# Altium PCB pcb.PcbDoc
Units mm, origin at the board's own origin, x right, y up, seen from the top; angles counter-clockwise.
Board outline 48.77 x 51.31 mm, 2 copper layers (Top Layer, Bottom Layer); 49 components, 38 nets, 197 pads, 79 vias.
Unrouted connection lines stored in the file: 2.
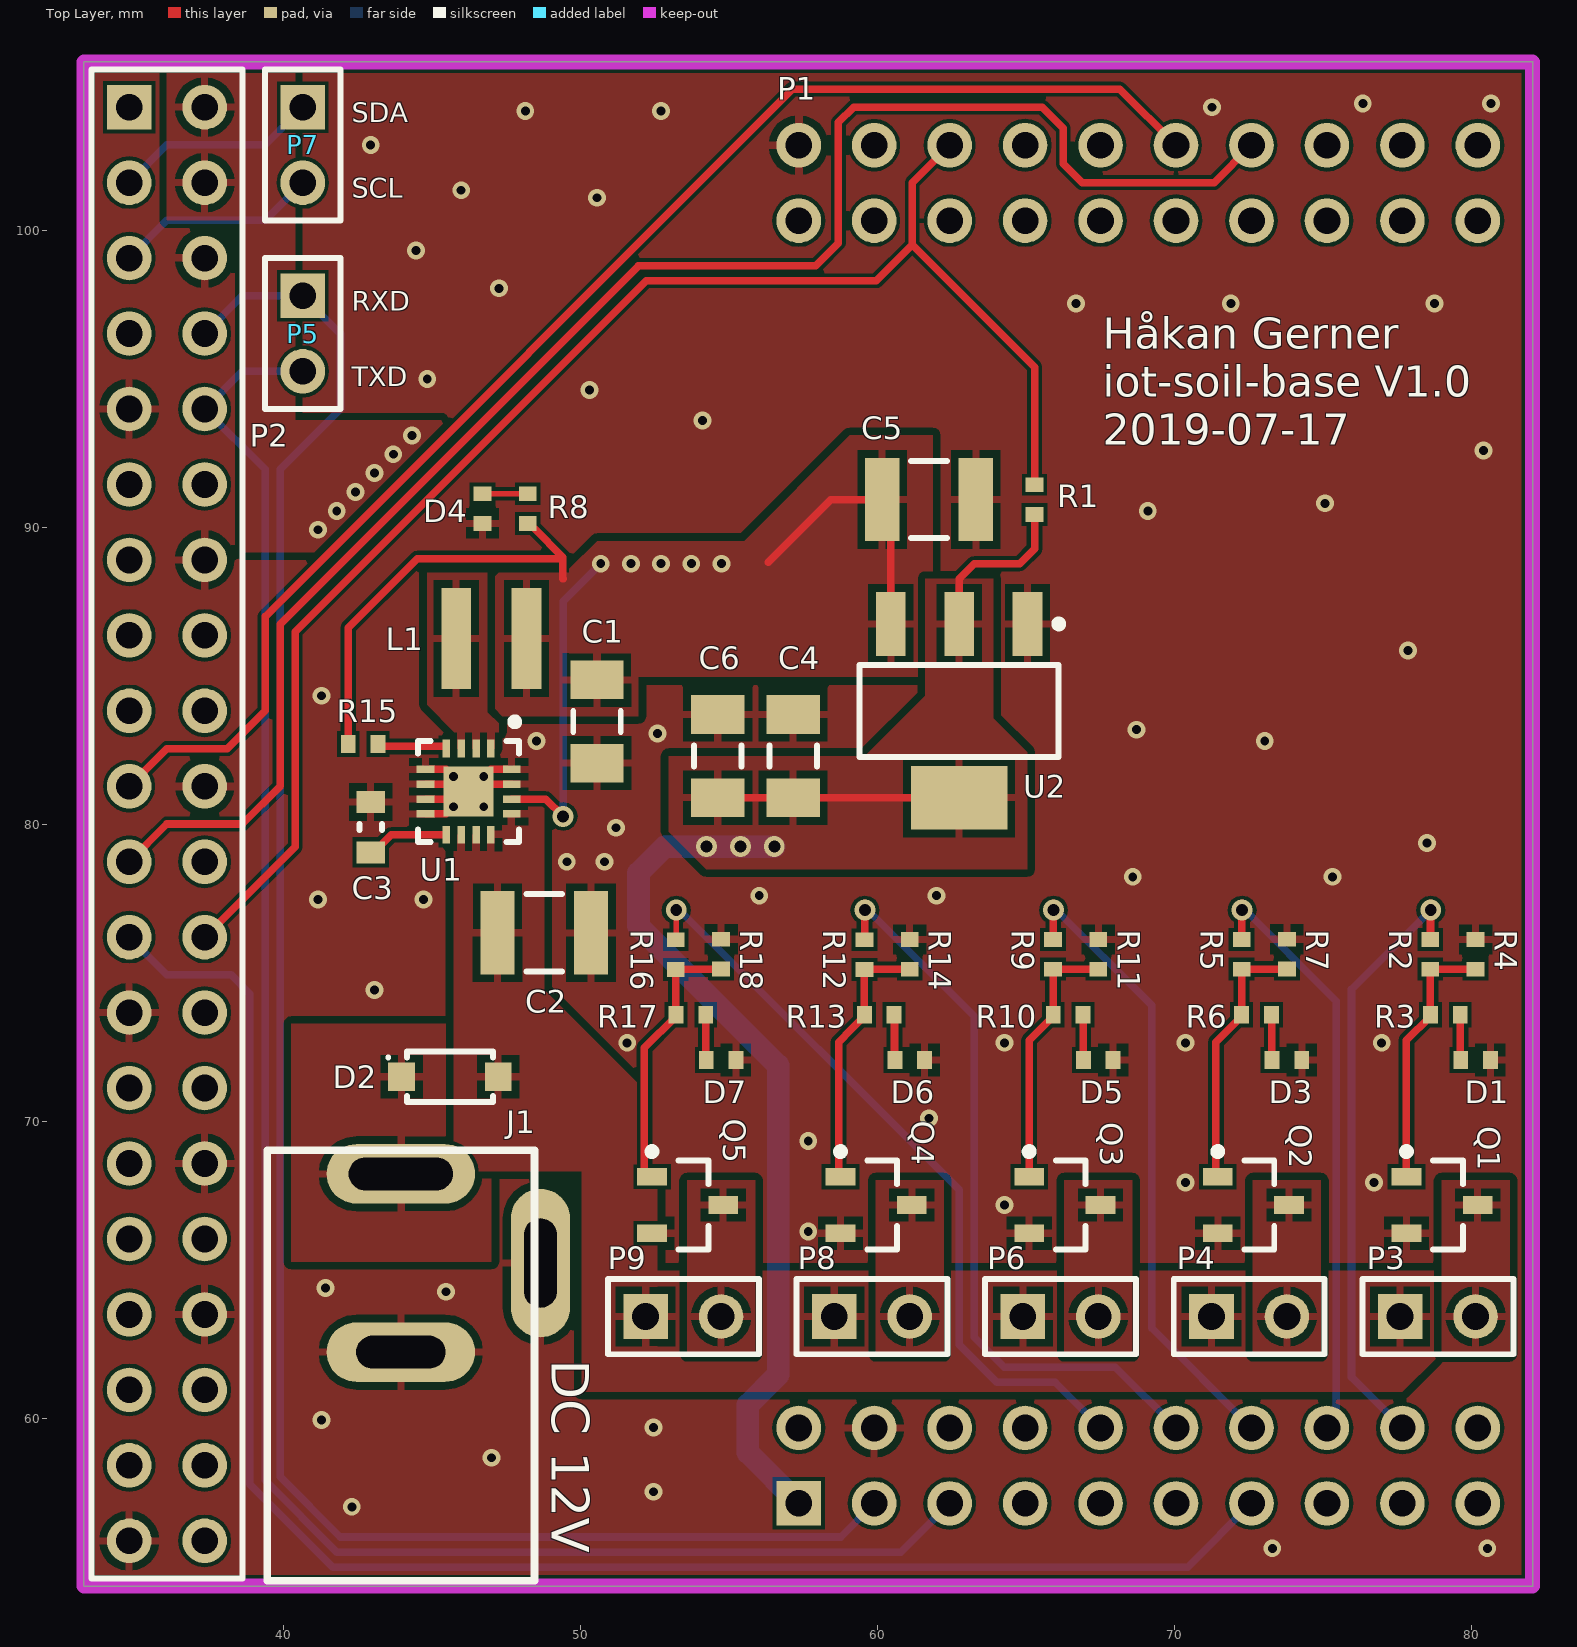
[diagram p0: Top Layer view]
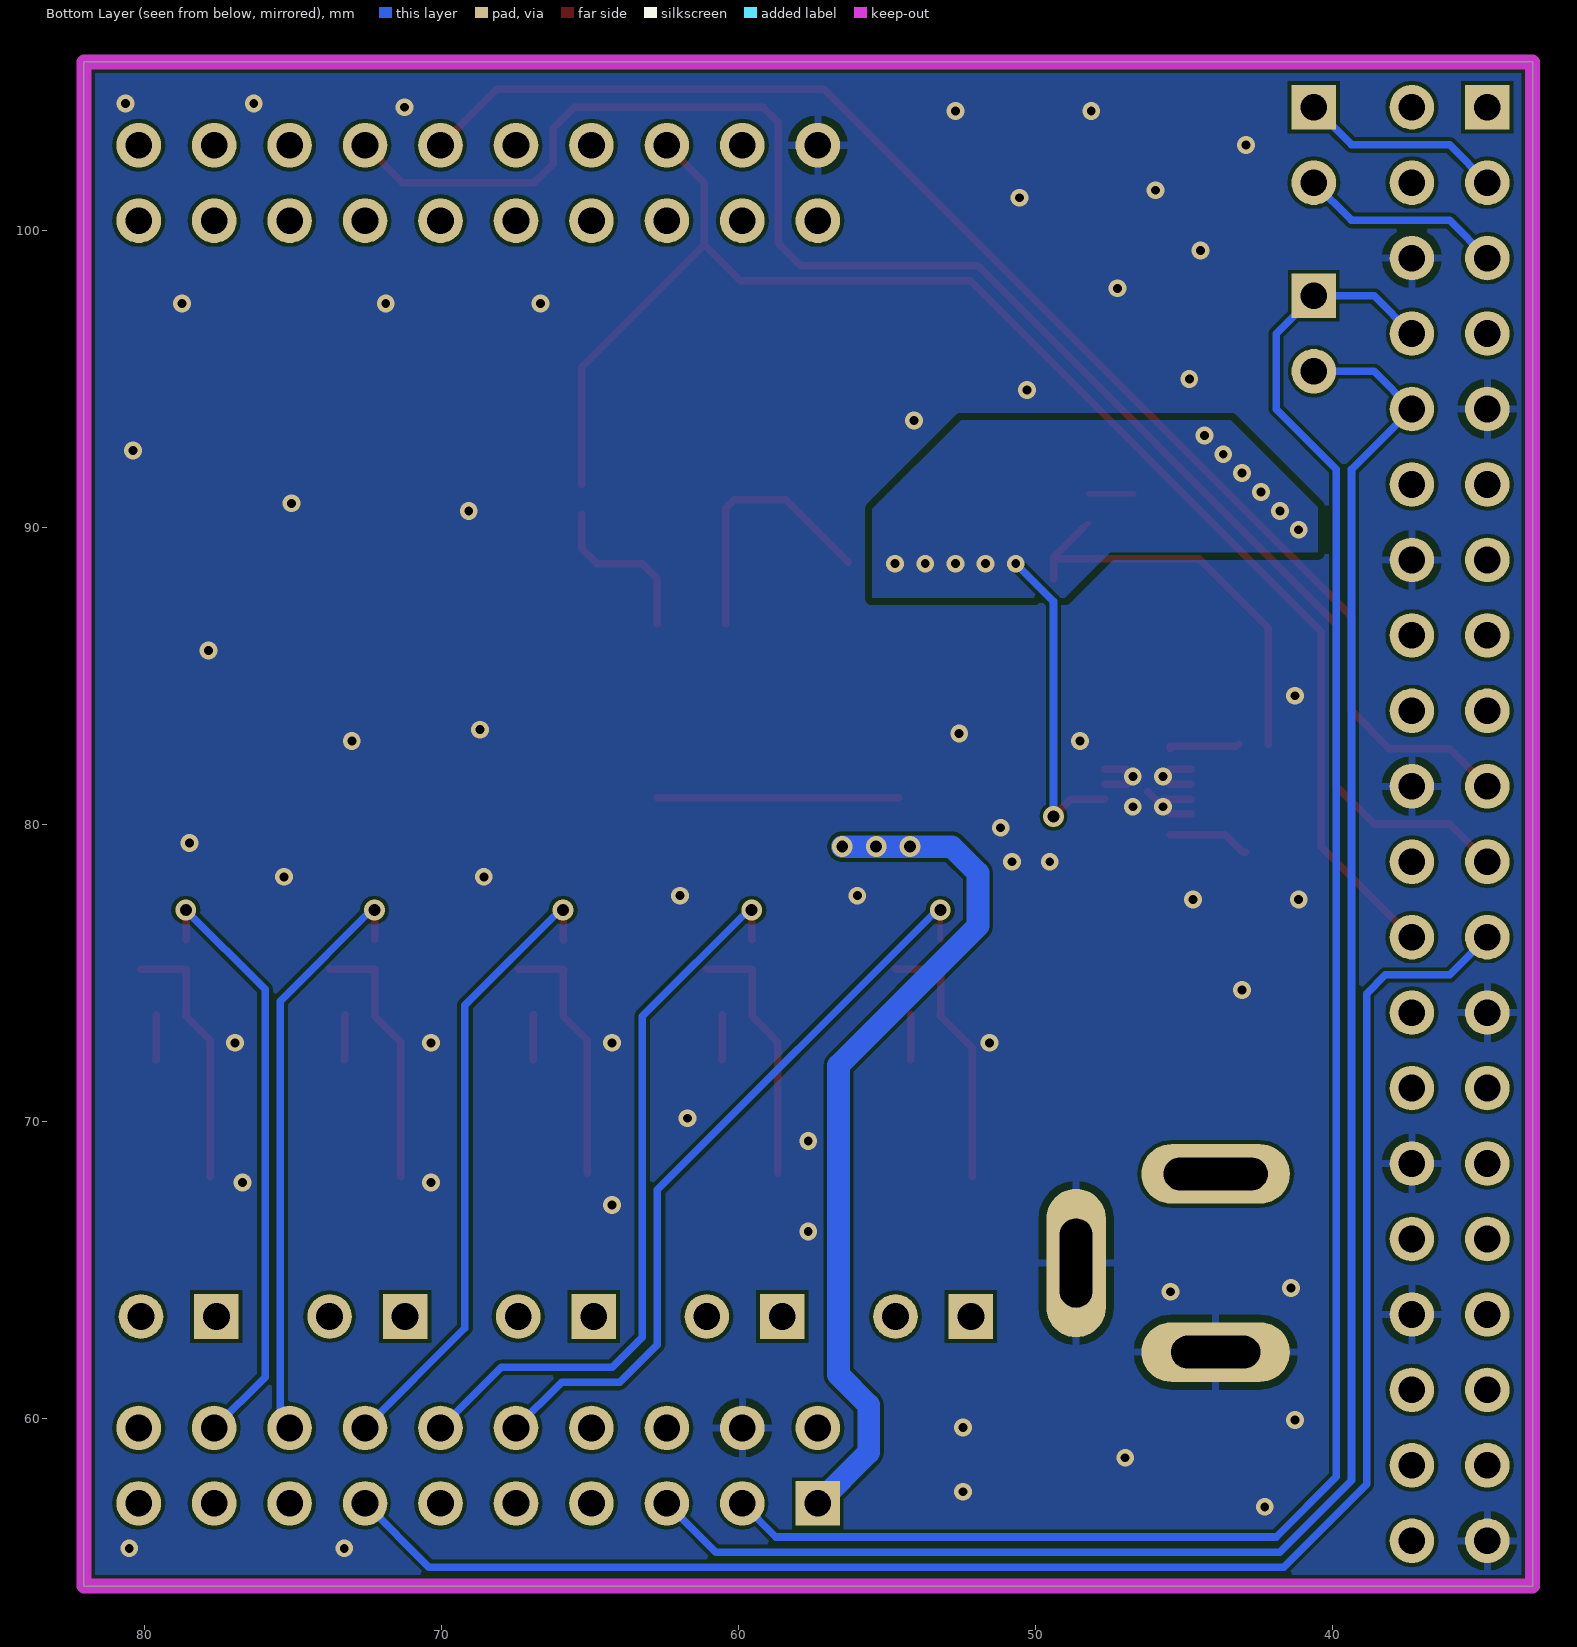
[diagram p1: Bottom Layer view, seen from below]
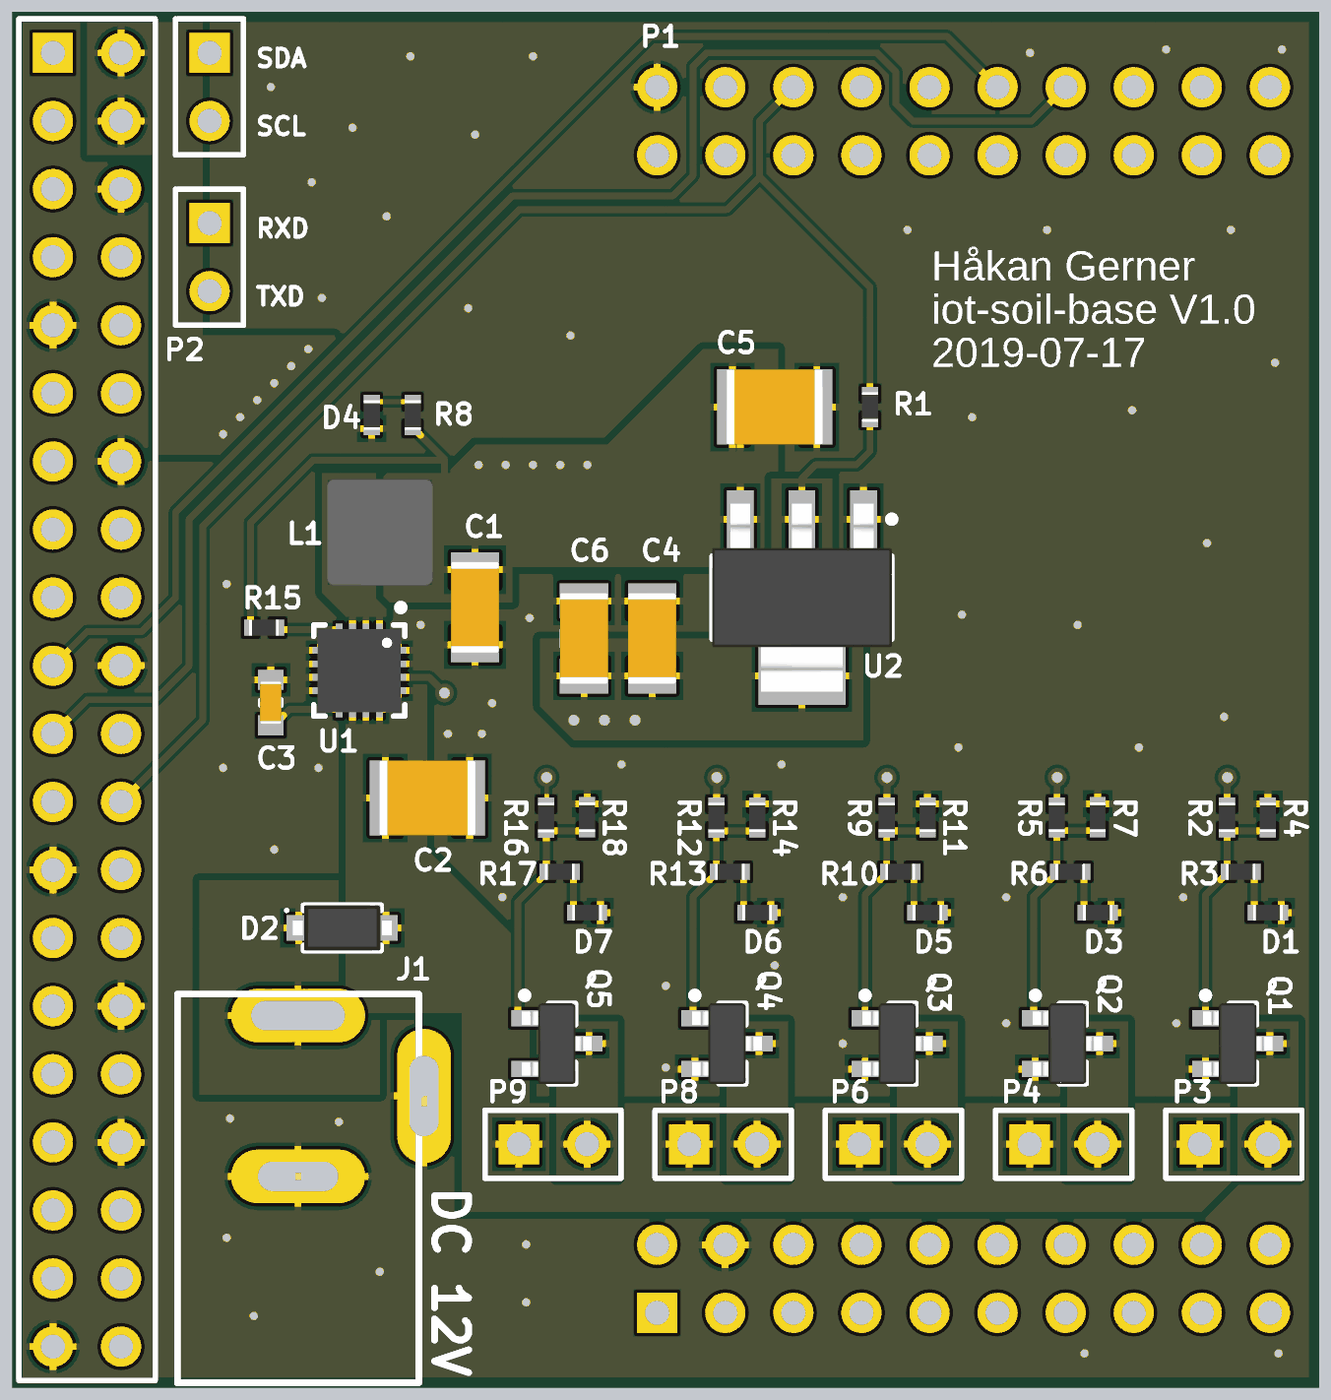
[diagram p2: 3D render of the assembled board from above, using the file's embedded part models]

## Layer stack, top to bottom
Top Solder: solder mask 0.0102, Solder Resist, Dk 3.5
Top Layer: signal copper 0.0356
Dielectric 1: dielectric 0.32, FR-4, Dk 4.8
Bottom Layer: signal copper 0.0356
Bottom Solder: solder mask 0.0102, Solder Resist, Dk 3.5

## Board outline
33.274,54.356 82.042,54.356 82.042,105.664 33.274,105.664

## Design rules (kind name [scope] priority, off if disabled: settings)
Clearance [All] p1: gap=0.127 ignorepadtopadclearanceinfootprint=FALSE except(0.254: Fill-Fill Fill-Poly Fill-Region Fill-Text Fill-Hole Poly-Poly Poly-Region Poly-Text Poly-Hole Region-Region Region-Text Region-Hole)
ComponentClearance ComponentClearance_1 [InComponent('P1')] p1: gap=0 collisioncheckmode=3 verticalgap=0 showdistances=FALSE
ComponentClearance [All] p2: gap=0.254 collisioncheckmode=3 verticalgap=0.254 showdistances=FALSE
PlaneConnect [All] p1: pad.planeconnectstyle=Relief pad.reliefexpansion=0.508 pad.reliefentries=4 pad.reliefconductorwidth=0.254 pad.reliefairgap=0.254 via.planeconnectstyle=Direct via.reliefexpansion=0.508 via.reliefentries=4 via.reliefconductorwidth=0.254 via.reliefairgap=0.254
PolygonConnect [All] p1: thpad.connectstyle=Relief thpad.reliefconductorwidth=0.254 thpad.reliefentries=4 thpad.polygonreliefangle="90 Angle" thpad.airgapwidth=0.254 smdpad.connectstyle=Relief smdpad.reliefconductorwidth=0.254 smdpad.reliefentries=4 smdpad.polygonreliefangle="90 Angle" smdpad.airgapwidth=0.254 via.connectstyle=Direct via.reliefconductorwidth=0.254 via.reliefentries=4 via.polygonreliefangle="90 Angle" via.airgapwidth=0.254
RoutingVias [All] p1: holewidth=0.4 width=0.7 viastyle="Through Hole" minholewidth=0.3 minwidth=0.6 maxholewidth=0.5 maxwidth=0.8
SolderMaskExpansion [All] p1: expansion=0.127
Width Width_1 [InNet('3V3') OR InNet('5V') OR InNet('GND') OR InNet('12V')] p1: maxlimit=0.762 minlimit=0.127 preferedwidth=0.254 minimp=50.000000 maximp=50.000000 favimp=50.000000
Width [All] p2: maxlimit=0.254 minlimit=0.127 preferedwidth=0.178 minimp=50.000000 maximp=50.000000 favimp=50.000000
28 further rules are at their usual default settings.

## Components (designator, comment, footprint, x,y, rotation, side; value= is the part's Value field where it differs from the comment)
C1 "GCJ31CR70J226KE01" "1206 (CAP)" 50.546,83.46 r270 top value=22uF
C2 "GCM32ER71E106KA57" "1210 (CAP)" 48.768,76.348 r0 top value=10uF
C3 "Cap" "0603 (CAP)" 42.926,79.904 r90 top value=3.3nF
C4 "GCJ31CR70J226KE01" "1206 (CAP)" 57.15,82.296 r90 top value=22uF
C5 "GCM32ER71E106KA57" "1210 (CAP)" 61.722,90.932 r0 top value=10uF
C6 "GCJ31CR70J226KE01" "1206 (CAP)" 54.61,82.296 r90 top value=22uF
D1 "SML-P11VTT86R" "0402 (RES)" 80.122,72.066 r0 top
D2 "D Schottky" SOD123 45.593,71.501 r0 top
D3 "SML-P11VTT86R" "0402 (RES)" 73.772,72.066 r0 top
D4 "SML-P11VTT86R" "0402 (RES)" 46.69,90.629 r270 top
D5 "SML-P11VTT86R" "0402 (RES)" 67.422,72.066 r0 top
D6 "SML-P11VTT86R" "0402 (RES)" 61.072,72.066 r0 top
D7 "SML-P11VTT86R" "0402 (RES)" 54.722,72.066 r0 top
J1 "Barrel Jack" PRT-00119 43.942,54.53 r0 top
L1 "XFL4020-222MEC" XFL4020-222MEC 46.99,86.254 r0 top value=2.2uH
P1 "TI LP" PINHEADER 68.768,80 r90 top locked
P2 "Raspberry Pi" HDR2X20 34.798,104.14 r270 top
P3 "Header 2" HDR1X2 77.582,63.43 r0 top
P4 "Header 2" HDR1X2 71.232,63.43 r0 top
P5 "Header 2" HDR1X2 40.64,97.79 r270 top
P6 "Header 2" HDR1X2 64.882,63.43 r0 top
P7 "Header 2" HDR1X2 40.64,104.14 r270 top
P8 "Header 2" HDR1X2 58.532,63.43 r0 top
P9 "Header 2" HDR1X2 52.182,63.43 r0 top
Q1 "ZXMN2F30FHTA" SOT23-NMOS 78.994,67.183 r0 top
Q2 "ZXMN2F30FHTA" SOT23-NMOS 72.644,67.183 r0 top
Q3 "ZXMN2F30FHTA" SOT23-NMOS 66.294,67.183 r0 top
Q4 "ZXMN2F30FHTA" SOT23-NMOS 59.944,67.183 r0 top
Q5 "ZXMN2F30FHTA" SOT23-NMOS 53.594,67.183 r0 top
R1 "DNM" "0402 (RES)" 65.278,90.932 r270 top value=10K
R2 "Res1" "0402 (RES)" 78.598,75.622 r90 top value=300
R3 "Res1" "0402 (RES)" 79.106,73.59 r0 top value=1.5K
R4 "Res1" "0402 (RES)" 80.122,75.622 r90 top value=100K
R5 "Res1" "0402 (RES)" 72.248,75.622 r90 top value=300
R6 "Res1" "0402 (RES)" 72.748,73.59 r0 top value=1.5K
R7 "Res1" "0402 (RES)" 73.772,75.63 r90 top value=100K
R8 "Res1" "0402 (RES)" 48.214,90.629 r90 top value=1.5K
R9 "Res1" "0402 (RES)" 65.898,75.622 r90 top value=300
R10 "Res1" "0402 (RES)" 66.406,73.59 r0 top value=1.5K
R11 "Res1" "0402 (RES)" 67.422,75.622 r90 top value=100K
R12 "Res1" "0402 (RES)" 59.548,75.614 r90 top value=300
R13 "Res1" "0402 (RES)" 60.048,73.59 r0 top value=1.5K
R14 "Res1" "0402 (RES)" 61.072,75.622 r90 top value=100K
R15 "Res1" "0402 (RES)" 42.672,82.698 r180 top value=100K
R16 "Res1" "0402 (RES)" 53.198,75.614 r90 top value=300
R17 "Res1" "0402 (RES)" 53.706,73.59 r0 top value=1.5K
R18 "Res1" "0402 (RES)" 54.722,75.63 r90 top value=100K
U1 "TPS62143" VQFN-16 46.224,81.1 r270 top
U2 "LM1117-3V3" SOT-223 62.738,83.82 r270 top

## Footprints (in the part's own frame and the unit in brackets; to place one, negate y for a bottom-side part, rotate by r counter-clockwise, add the part's x,y. Pads: shape width x height; smd on the part's side, far side on the other; paste and mask are expansions set on the pad)
"0402 (RES)" [mm] "Chip Resistor, 2-Leads, Body 1,00x0,50mm, IPC Medium Density"
  rect 0.5x0.6 smd: 1(-0.5,0) 2(0.5,0)
  body extent -0.55,-0.3 0.55,0.3, height 0.4
"0603 (CAP)" [mm] "Chip Capacitor, 2-Leads, Body 1,60x0,80mm, IPC Medium Density"
  rect 0.75x0.95 smd: 1(-0.85,0) 2(0.85,0)
  silkscreen extent -0.1,-0.38 0.1,0.38, body extent -0.8,-0.4 0.8,0.4, height 0.6
"1206 (CAP)" [mm] "Chip Capacitor, 2-Leads, Body 3,20x1,60mm, IPC Medium Density"
  rect 1.3x1.8 smd: 1(-1.4,0) 2(1.4,0)
  silkscreen extent -0.35,-0.8 0.35,0.8, body extent -1.7,-0.9 1.7,0.9, height 1.35
"1210 (CAP)" [mm] "Chip Capacitor, 2-Leads, Body 3,20x2,50mm, IPC Medium Density"
  rect 1.15x2.8 smd: 1(-1.575,0) 2(1.575,0)
  silkscreen extent -0.6,-1.3 0.6,1.3, body extent -1.8,-1.4 1.8,1.4, height 2.8
HDR1X2 [mm] "Connector; Header; 2 Position"
  rect 1.5x1.5 hole 0.9: 1(0,0)
  round 1.5 hole 0.9: 2(2.54,0)
  silkscreen extent -1.27,-1.27 3.81,1.27
HDR2X20 [mm] "Connector; Header; 20x2 Position"
  rect 1.5x1.5 hole 0.9: 1(0,0)
  round 1.5 hole 0.9: 2(0,2.54) 3(2.54,0) 4(2.54,2.54) 5(5.08,0) 6(5.08,2.54) 7(7.62,0) 8(7.62,2.54) 9(10.16,0) 10(10.16,2.54) 11(12.7,0) 12(12.7,2.54) 13(15.24,0) 14(15.24,2.54) 15(17.78,0) 16(17.78,2.54) 17(20.32,0) 18(20.32,2.54) 19(22.86,0) 20(22.86,2.54) 21(25.4,0) 22(25.4,2.54) 23(27.94,0) 24(27.94,2.54) 25(30.48,0) 26(30.48,2.54) 27(33.02,0) 28(33.02,2.54) 29(35.56,0) 30(35.56,2.54) 31(38.1,0) 32(38.1,2.54) 33(40.64,0) 34(40.64,2.54) 35(43.18,0) 36(43.18,2.54) 37(45.72,0) 38(45.72,2.54) 39(48.26,0) 40(48.26,2.54)
  silkscreen extent -1.27,-1.27 49.53,3.81
PINHEADER [mm]
  rect 1.5x1.5 hole 0.9: 1(-22.86,11.43)
  round 1.5 hole 0.9: 2(-22.86,8.89) 3(-22.86,6.35) 4(-22.86,3.81) 5(-22.86,1.27) 6(-22.86,-1.27) 7(-22.86,-3.81) 8(-22.86,-6.35) 9(-22.86,-8.89) 10(-22.86,-11.43) 11(22.86,-11.43) 12(22.86,-8.89) 13(22.86,-6.35) 14(22.86,-3.81) 15(22.86,-1.27) 16(22.86,1.27) 17(22.86,3.81) 18(22.86,6.35) 19(22.86,8.89) 20(22.86,11.43) 21(-20.32,11.43) 22(-20.32,8.89) 23(-20.32,6.35) 24(-20.32,3.81) 25(-20.32,1.27) 26(-20.32,-1.27) 27(-20.32,-3.81) 28(-20.32,-6.35) 29(-20.32,-8.89) 30(-20.32,-11.43) 31(20.32,-11.43) 32(20.32,-8.89) 33(20.32,-6.35) 34(20.32,-3.81) 35(20.32,-1.27) 36(20.32,1.27) 37(20.32,3.81) 38(20.32,6.35) 39(20.32,8.89) 40(20.32,11.43)
PRT-00119 [mm]
  oval 5x2 hole 1.1 slot 3.5 at 0 deg: 1(0,13.7)
  oval 5x2 hole 1.1 slot 3 at 0 deg: 2(0,7.7)
  oval 2x5 hole 1.1 slot 3 at 90 deg: 3(4.7,10.7)
  silkscreen extent -4.5,0 4.5,14.5
SOD123 [mm] "SODFL, 2-Leads, Body 1,55x3,70mm, IPC Medium Density"
  rect 0.9x0.95 smd: 1(-1.625,0) 2(1.625,0)
  silkscreen extent -2.12,-0.85 1.45,0.85, body extent -1.85,-0.85 1.85,0.85, height 1.45
SOT23-NMOS [mm] "SOT23, 3-Leads, Body 2,90x2,45mm, Pitch 0,95mm, IPC Medium Density"
  rect 1x0.6 smd: 1(-1.2,0.95) 2(-1.2,-0.95) 3(1.2,0)
  silkscreen extent -1.32,-1.5 0.7,1.92, body extent -1.3,-1.5 1.3,1.5, height 1.1
SOT-223 [mm] "SOT223, 4-Leads, Body 6,50x7,00mm (avg), Pitch 2,30mm, IPC Medium Density"
  rect 2.15x1 smd: 1(-2.925,2.3) 2(-2.925,0) 3(-2.925,-2.3)
  rect 2.15x3.25 smd: 4(2.925,0)
  silkscreen extent -3.05,-3.35 1.55,3.48, body extent -3.5,-3.35 3.5,3.35, height 1.7
VQFN-16 [mm] "QFN, 16-Leads, Body 3,00x3,00mm, Pitch 0,50mm, Thermal Pad 1,68x1,68mm, IPC Medium Density"
  rect 0.6x0.25 smd: 1(-1.45,0.75) 2(-1.45,0.25) 3(-1.45,-0.25) 4(-1.45,-0.75) 9(1.45,-0.75) 10(1.45,-0.25) 11(1.45,0.25) 12(1.45,0.75)
  rect 0.25x0.6 smd: 5(-0.75,-1.45) 6(-0.25,-1.45) 7(0.25,-1.45) 8(0.75,-1.45) 13(0.75,1.45) 14(0.25,1.45) 15(-0.25,1.45) 16(-0.75,1.45)
  rect 1.68x1.68 smd: 17(0,0)
  silkscreen extent -2.47,-1.7 1.7,1.7, body extent -1.55,-1.55 1.55,1.55, height 1
XFL4020-222MEC [mm]
  rect 1x3.4 smd: 1(-1.185,0) 2(1.185,0)
  body extent -1.99,-2 2.01,2, height 2.1

## Part data
C1 C4 C6: library part Cap, "1206", LatestRevisionDate=17-Jul-2002, LatestRevisionNote="Re-released for DXP Platform.", PackageDescription="Radial Cap, Thru-Hole; 2 Leads; 0.3 in Pin Spacing", PackageReference=RAD-0.3, Published=8-Jun-2000, Publisher="Altium Limited"
C2 C5: library part Cap, "1210", LatestRevisionDate=17-Jul-2002, LatestRevisionNote="Re-released for DXP Platform.", PackageDescription="Radial Cap, Thru-Hole; 2 Leads; 0.3 in Pin Spacing", PackageReference=RAD-0.3, Published=8-Jun-2000, Publisher="Altium Limited"
C3: "0603", LatestRevisionDate=17-Jul-2002, LatestRevisionNote="Re-released for DXP Platform.", PackageDescription="Radial Cap, Thru-Hole; 2 Leads; 0.3 in Pin Spacing", PackageReference=RAD-0.3, Published=8-Jun-2000, Publisher="Altium Limited"
D1 D3 D4 D5 D6 D7: library part LED2, "Typical RED, GREEN, YELLOW, AMBER GaAs LED", LatestRevisionDate=17-Jul-2002, LatestRevisionNote="Re-released for DXP Platform.", PackageDescription="SM LED; 2 Flat Leads", PackageReference=3.2X1.6X1.1, PackageVersion=Feb-2002, Published=8-Jun-2000, Publisher="Altium Limited"
D2: "Schottky Diode", Code_JEDEC=DO-214-AA, LatestRevisionDate=17-Jul-2002, LatestRevisionNote="Re-released for DXP Platform.", PackageDescription="DO-214-AA/SMB; 2 C-Bend Leads; Body 5.3 x 3.6 mm, inc. leads (LxW)", PackageReference=SMB, Published=8-Jun-2000, Publisher="Altium Limited"
J1: library part "DC Barrel"
L1: library part Inductor, "Inductor", Code_IEC=1005, Code_JEITA=0402, LatestRevisionDate=29-May-2009, LatestRevisionNote="IPC-7351 Footprint Added.", PackageDescription="Chip Inductor", PackageReference=0402-A, Published=8-Jun-2000, Publisher="Altium Limited"
P1 P2: library part "Header 20X2", "Header, 20-Pin, Dual row", LatestRevisionDate=17-Jul-2002, LatestRevisionNote="Re-released for DXP Platform.", Publisher="Altium Limited"
P3 P4 P5 P6 P7 P8 P9: "Header, 2-Pin", LatestRevisionDate=17-Jul-2002, LatestRevisionNote="Re-released for DXP Platform.", Publisher="Altium Limited"
Q1 Q2 Q3 Q4 Q5: library part NMOS-2, "N-Channel Power MOSFET", ComponentLink1Description="Manufacturer Link", ComponentLink1URL=http://www.irf.com/, DatasheetVersion=PD-9.814, LatestRevisionDate=17-Jul-2002, LatestRevisionNote="Re-released for DXP Platform.", Note="Pin 2 is electrically connected to pin 4.", PackageDescription="TO, Thru-Hole, Vertical, Heatsink Mounted; 3 In-Line Leads; Pitch 2.54 mm", PackageReference=TO-220AB, PackageVersion=Feb-1997, Published=8-Jun-2000, Publisher="Altium Limited"
R1: library part Res1, "Resistor", LatestRevisionDate=17-Jul-2002, LatestRevisionNote="Re-released for DXP Platform.", PackageDescription="Axial Device, Thru-Hole; 2 Leads; 0.3 in Pin Spacing", PackageReference=AXIAL-0.3, Published=8-Jun-2000, Publisher="Altium Limited"
R2 R3 R4 R5 R6 R7 R8 R9 R10 R11 R12 R13 R14 R15 R16 R17 R18: "Resistor", LatestRevisionDate=17-Jul-2002, LatestRevisionNote="Re-released for DXP Platform.", PackageDescription="Axial Device, Thru-Hole; 2 Leads; 0.3 in Pin Spacing", PackageReference=AXIAL-0.3, Published=8-Jun-2000, Publisher="Altium Limited"
U1: "5V, 2A Switched Buck Regulator"
U2: library part LM1117-FIXED, "Linear Voltage Regulator 800 mA 1.2V Dropout"

## Via types
v1: diameter 0.6, hole 0.3, Top Layer to Bottom Layer, tented both sides, 70 vias
v2: diameter 0.7, hole 0.4, Top Layer to Bottom Layer, tented both sides, 9 vias

## Nets (pads, with @x,y where several pads share a name; then routed paths per layer and width w, separated by ;. In a path a pad name is that pad's centre, name@x,y a point inside that pad or via, vN(x,y) a via of type N, cw(c..) or ccw(c..) an arc to the next point about the centre after c; other vN are vias at no path point)
3V3: C4.1 C6.1 P1.1 R1.2 U2.2 U2.4 | length 43
  Top Layer w0.178: C6.1@54.607,80.899 C6.1
  Top Layer w0.254: C6.1 C4.1 ; C4.1@57.15,80.895 U2.4 ; U2.2 62.738,88.265 63.246,88.773 64.77,88.773 65.278,89.281 R1.2
  Bottom Layer w0.762: v2(56.515,79.248) v2(55.372,79.248) v2(54.229,79.248) 52.832,79.248 51.943,78.359 51.943,76.581 56.642,71.882 56.642,61.468 55.626,60.452 55.626,58.852 P1.1
5V: C1.1 C5.1 L1.2 P2.2 P2.4 R8.1 R15.2 U1.14 U2.3 | length 35.9
  Top Layer w0.178: R8.1 48.264,90.129 48.426,89.968 48.426,89.918 49.399,88.944
  Top Layer w0.254: R15.2 42.172,86.622 44.494,88.944 49.399,88.944 ; U1.14 48.817,80.85 v2(49.403,80.264) ; R8.1@48.426,89.968 49.399,88.994 49.399,88.944 ; 49.403,88.265 49.399,88.269 49.399,88.944 ; 56.314,88.826 58.42,90.932 C5.1 60.438,90.641 U2.3
  Bottom Layer w0.254: v2(49.403,80.264) 49.403,87.503 v1(50.673,88.773)
  other v1: 51.689,88.773 52.705,88.773 53.721,88.773 54.737,88.773 41.148,89.916 41.783,90.551 42.418,91.186 43.053,91.821 43.688,92.456 44.323,93.091
12V: C2.1 D2.2 P3.1 P4.1 P6.1 P8.1 P9.1 U1.10 U1.11 U1.12 U1.13
GND: C1.2 C2.2 C3.2 C4.2 C5.2 C6.2 D1.2 D3.2 D4.2 D5.2 D6.2 D7.2 J1.2 J1.3 P1.20 P1.22 P2.6 P2.9 P2.14 P2.20 P2.25 P2.30 P2.34 P2.39 Q1.2 Q2.2 Q3.2 Q4.2 Q5.2 R4.2 R7.2 R11.2 R14.2 R18.2 U1.5 U1.6 U1.7 U1.8 U1.15 U1.16 U1.17 U2.1 | length 6.9
  Top Layer w0.254: U1.8 45.474,80.35 v1(45.716,80.592) U1.17 ; U1.7 U1.17@45.716,80.85 ; U1.6 45.511,81.35 45.716,81.555 v1(45.716,81.608) 45.474,81.85 U1.5 ; U1.15 46.937,81.35 46.732,81.555 v1(46.732,81.608) 46.974,81.85 U1.16
  other v1: 73.279,55.626 80.518,55.626 42.291,57.023 52.451,57.531 46.99,58.674 52.451,59.69 41.275,59.944 45.466,64.262 41.402,64.389 57.658,66.294 64.262,67.183 70.358,67.945 76.708,67.945 57.658,69.342 61.722,70.104 51.562,72.644 64.262,72.644 70.358,72.644 76.962,72.644 43.053,74.422 41.148,77.47 44.704,77.47 56.007,77.597 61.976,77.597 68.58,78.232 75.311,78.232 49.53,78.74 50.8,78.74 78.486,79.375 51.181,79.883 46.732,80.592 48.514,82.804 73.025,82.804 52.578,83.058 68.707,83.185 41.275,84.328 77.851,85.852 69.088,90.551 75.057,90.805 80.391,92.583 54.102,93.599 50.292,94.615 44.831,94.996 66.675,97.536 71.882,97.536 78.74,97.536 47.244,98.044 44.45,99.314 50.546,101.092 45.974,101.346 42.926,102.87 48.133,104.013 52.705,104.013 71.247,104.14 76.327,104.267 80.645,104.267
LP_RXD: P1.2 P2.8 P5.1 | length 66.3
  Bottom Layer w0.254: P2.8 38.608,97.79 P5.1 41.91,96.52 41.91,93.98 39.878,91.948 39.878,58.039 41.91,56.007 58.745,56.007 P1.2
LP_TXD: P1.3 P2.10 P5.2 | length 65.5
  Bottom Layer w0.254: P5.2 38.608,95.25 P2.10 39.37,91.948 39.37,57.912 41.783,55.499 60.777,55.499 P1.3
NetC3_1: C3.1 U1.9 | length 2.8
  Top Layer w0.254: C3.1 43.026,79.054 43.622,79.65 U1.9
NetD1_1: D1.1 R3.2 | length 1.5
  Top Layer w0.254: R3.2 79.614,73.582 79.614,72.074 D1.1
NetD2_1: D2.1 J1.1
NetD3_1: D3.1 R6.2 | length 1.5
  Top Layer w0.254: R6.2 73.26,73.578 73.26,72.078 D3.1
NetD4_1: D4.1 R8.2 | length 1.5
  Top Layer w0.178: D4.1 R8.2
NetD5_1: D5.1 R10.2 | length 1.5
  Top Layer w0.254: R10.2 66.914,73.582 66.914,72.074 D5.1
NetD6_1: D6.1 R13.2 | length 1.5
  Top Layer w0.254: R13.2 60.56,73.578 60.56,72.078 D6.1
NetD7_1: D7.1 R17.2 | length 1.5
  Top Layer w0.254: R17.2 54.214,73.582 54.214,72.074 D7.1
NetL1_1: L1.1 U1.1 U1.2 U1.3
NetP3_2: P3.2 Q1.3
NetP4_2: P4.2 Q2.3
NetP6_2: P6.2 Q3.3
NetP8_2: P8.2 Q4.3
NetP9_2: P9.2 Q5.3
NetQ1_1: Q1.1 R2.1 R3.1 R4.1 | length 8.9
  Top Layer w0.254: Q1.1 77.794,72.728 78.606,73.54 R3.1 78.602,73.594 78.602,75.118 R2.1 R4.1
NetQ2_1: Q2.1 R5.1 R6.1 R7.1 | length 8.9
  Top Layer w0.254: Q2.1@71.378,68.133 71.378,72.67 72.248,73.54 R6.1 R5.1 72.252,75.126 73.768,75.126 R7.1
NetQ3_1: Q3.1 R9.1 R10.1 R11.1 | length 8.7
  Top Layer w0.254: Q3.1@65.094,68.26 65.094,72.728 65.456,73.09 65.906,73.54 R10.1 65.902,73.594 65.902,75.118 R9.1 R11.1
NetQ4_1: Q4.1 R12.1 R13.1 R14.1 | length 8.7
  Top Layer w0.254: Q4.1@58.678,68.26 58.678,72.67 59.106,73.098 59.548,73.54 R13.1 R12.1 61.064,75.114 R14.1
NetQ5_1: Q5.1 R16.1 R17.1 R18.1 | length 9
  Top Layer w0.254: Q5.1@52.14,68.133 52.14,72.474 53.206,73.54 R17.1 53.202,73.594 53.202,75.118 53.206,75.122 54.714,75.122 R18.1
NetR15_1: R15.1 U1.4 | length 2.4
  Top Layer w0.254: R15.1 43.246,82.624 45.472,82.624 45.474,82.622 U1.4
RESET: P1.35
SCL: P2.5 P7.2 | length 6.9
  Bottom Layer w0.254: P2.5 36.068,100.33 39.37,100.33 P7.2
SDA: P2.3 P7.1 | length 6.9
  Bottom Layer w0.254: P2.3 36.068,102.87 39.37,102.87 P7.1
SPI_CLK: P1.7 P2.23 | length 57.1
  Bottom Layer w0.254: P2.23 36.068,74.93 38.227,74.93 38.862,74.295 38.862,57.785 41.656,54.991 70.429,54.991 P1.7
SPI_CS_N: P1.18 P2.24 R1.1 | length 51.4
  Top Layer w0.254: P2.24 40.386,79.248 40.386,86.487 52.197,98.298 59.944,98.298 61.158,99.512 ; P1.18 61.158,101.6 61.158,99.512 ; R1.1 65.278,95.392 61.158,99.512
SPI_MISO: P1.14 P2.21 | length 56.2
  Top Layer w0.254: P2.21 36.068,80.01 38.608,80.01 39.878,81.28 39.878,86.741 51.943,98.806 57.912,98.806 58.674,99.568 58.674,103.632 59.182,104.14 65.532,104.14 66.243,103.429 66.243,102.235 66.878,101.6 71.318,101.6 P1.14
SPI_MOSI: P1.15 P2.19 | length 47.6
  Top Layer w0.254: P2.19 36.068,82.55 38.1,82.55 39.37,83.82 39.37,86.995 57.125,104.75 68.148,104.75 P1.15
Valve1: P1.25 R16.2 | length 25.7
  Top Layer w0.178: R16.2 53.213,76.129 v2(53.213,77.113) v2@53.213,77.216
  Bottom Layer w0.254: v2@53.213,77.216 62.738,67.691 62.738,62.484 64.008,61.214 65.964,61.214 P1.25
Valve2: P1.26 R12.2 | length 25.2
  Top Layer w0.254: R12.2 59.555,76.121 v2@59.555,77.208 ; v2@59.555,77.328 v2@59.563,77.335
  Bottom Layer w0.254: v2@59.563,77.216 63.246,73.533 63.246,62.738 64.262,61.722 67.996,61.722 P1.26
  other v2: 59.563,77.113
Valve3: P1.27 R9.2 | length 21.4
  Top Layer w0.254: R9.2 65.905,76.129 v2@65.905,77.208 ; v2@65.905,77.328 v2@65.913,77.335
  Bottom Layer w0.254: v2@65.913,77.216 69.215,73.914 69.215,63.043 P1.27
  other v2: 65.913,77.113
Valve4: P1.28 R5.2 | length 20.1
  Top Layer w0.254: R5.2 72.255,76.129 v2@72.255,77.208 ; v2@72.255,77.328 v2@72.263,77.335
  Bottom Layer w0.254: v2@72.263,77.216 75.438,74.041 75.438,60 P1.28
  other v2: 72.263,77.113
Valve5: P1.29 R2.2 | length 20.5
  Top Layer w0.254: R2.2 78.605,76.129 v2@78.605,77.328 ; v2@78.605,77.335 v2@78.605,77.328 ; v2@78.613,77.335 v2@78.605,77.328
  Bottom Layer w0.254: P1.29 75.946,61.392 75.946,74.446 v2(78.613,77.113)
pads on no net: P1.4 P1.5 P1.6 P1.8 P1.9 P1.10 P1.11 P1.12 P1.13 P1.16 P1.17 P1.19 P1.21 P1.23 P1.24 P1.30 P1.31 P1.32 P1.33 P1.34 P1.36 P1.37 P1.38 P1.39 P1.40 P2.1 P2.7 P2.11 P2.12 P2.13 P2.15 P2.16 P2.17 P2.18 P2.22 P2.26 P2.27 P2.28 P2.29 P2.31 P2.32 P2.33 P2.35 P2.36 P2.37 P2.38 P2.40

## Polygon pours and split planes (outlines as drawn)
5V on Top Layer "Top Layer-5V 2" (solid, pour order 33): 45.466,93.599 41.021,89.154 38.608,89.154 38.608,100.33 36.068,100.33 36.068,105.664 40.386,105.664 40.386,93.599
12V on Top Layer "Top Layer-12V 2" (solid, pour order 30): 48.768,78.002 48.768,74.422 52.578,70.612 52.578,60.898 50.038,60.898 50.038,68.326 45.72,68.326 45.72,78.002
NetD2_1 on Top Layer "Top Layer-NetD2_1" (solid, pour order 31): 40.259,73.279 40.259,65.278 46.99,65.278 46.99,69.85 45.593,69.85 45.593,73.279
GND on Top Layer "NONET_L01_P030" (solid, pour order 39): 33.274,54.356 82.042,54.356 82.042,105.664 33.274,105.664
12V on Top Layer "Top Layer-12V" (solid, pour order 28): 48.764,74.496 48.764,80.592 45.716,80.592 45.716,74.496
5V on Top Layer "Top Layer-5V" (solid, pour order 26): 53.291,89.535 50.551,89.535 49.619,88.603 49.619,84.963 57.316,84.963 61.341,84.963 61.849,85.471 61.849,93.091 59.055,93.091 55.499,89.535
5V on Top Layer "Top Layer-5V 1" (solid, pour order 24): 46.859,83.64 51.939,83.64 51.939,88.466 47.24,88.466 46.859,88.085
NetL1_1 on Top Layer "Top Layer-NetL1_1" (solid, pour order 20): 46.859,88.466 46.859,83.777 47.24,83.396 47.24,82.116 45.843,82.116 45.843,83.005 44.827,84.021 44.827,88.466
3V3 on Top Layer "Top Layer-3V3" (solid, pour order 18): 54.229,78.486 52.959,79.756 52.959,82.296 59.563,82.296 61.595,84.328 61.595,88.265 63.881,88.265 63.881,83.566 65.024,82.423 65.024,78.486 61.214,78.486
12V on Top Layer "Top Layer-12V 1" (solid, pour order 12): 76.835,60.898 77.658,60.898 78.867,62.107 78.867,64.962 50.912,64.962 50.912,60.898
NetP9_2 on Top Layer "Top Layer-NetP9_2" (solid, pour order 10): 55.865,62.168 55.865,68.01 53.579,68.01 53.579,62.168
NetP8_2 on Top Layer "Top Layer-NetP8_2" (solid, pour order 6): 62.215,62.168 62.215,68.01 59.929,68.01 59.929,62.168
NetP6_2 on Top Layer "Top Layer-NetP6_2" (solid, pour order 4): 68.565,62.168 68.565,68.01 66.279,68.01 66.279,62.168
NetP4_2 on Top Layer "Top Layer-NetP4_2" (solid, pour order 2): 74.915,62.168 74.915,68.01 72.629,68.01 72.629,62.168
NetP3_2 on Top Layer "Top Layer-NetP3_2" (solid, pour order 0): 81.265,62.168 81.265,68.01 78.979,68.01 78.979,62.168
5V on Bottom Layer "Bottom Layer-5V" (solid, pour order 35): 55.499,90.614 52.514,93.599 43.434,93.599 40.513,90.678 40.513,89.154 47.498,89.154 49.022,87.63 55.499,87.63
GND on Bottom Layer "NONET_L01_P030" (solid, pour order 41): 33.274,54.356 82.042,54.356 82.042,105.664 33.274,105.664

## Keep-outs
Keep-Out Layer:
  lines w0.5: 33.274,54.356 33.274,105.664 ; 33.274,54.356 82.042,54.356 ; 33.274,54.356 33.274,105.664 ; 33.274,54.356 82.042,54.356 ; 33.274,105.664 82.042,105.664 ; 33.274,105.664 82.042,105.664 ; 82.042,54.356 82.042,105.664 ; 82.042,54.356 82.042,105.664

## Silkscreen, mask and mechanical layers (free items; w line width, h text height)
Top Overlay:
  text "SDA" at 42.291,103.632 h0.66
  text "SCL" at 42.291,101.092 h0.66
  text "RXD" at 42.291,97.282 h0.66
  text "Håkan Gerner" at 67.571,95.656 h1.78
  text "TXD" at 42.291,94.742 h0.66
  text "iot-soil-base V1.0" at 67.571,94.043 h1.78
  text "2019-07-17" at 67.571,92.431 h1.78
  text "DC 12V" at 49.022,61.976 h1.27 r270